# EAGLE board v001 - all (EAGLE 6.4), part 1 of 2
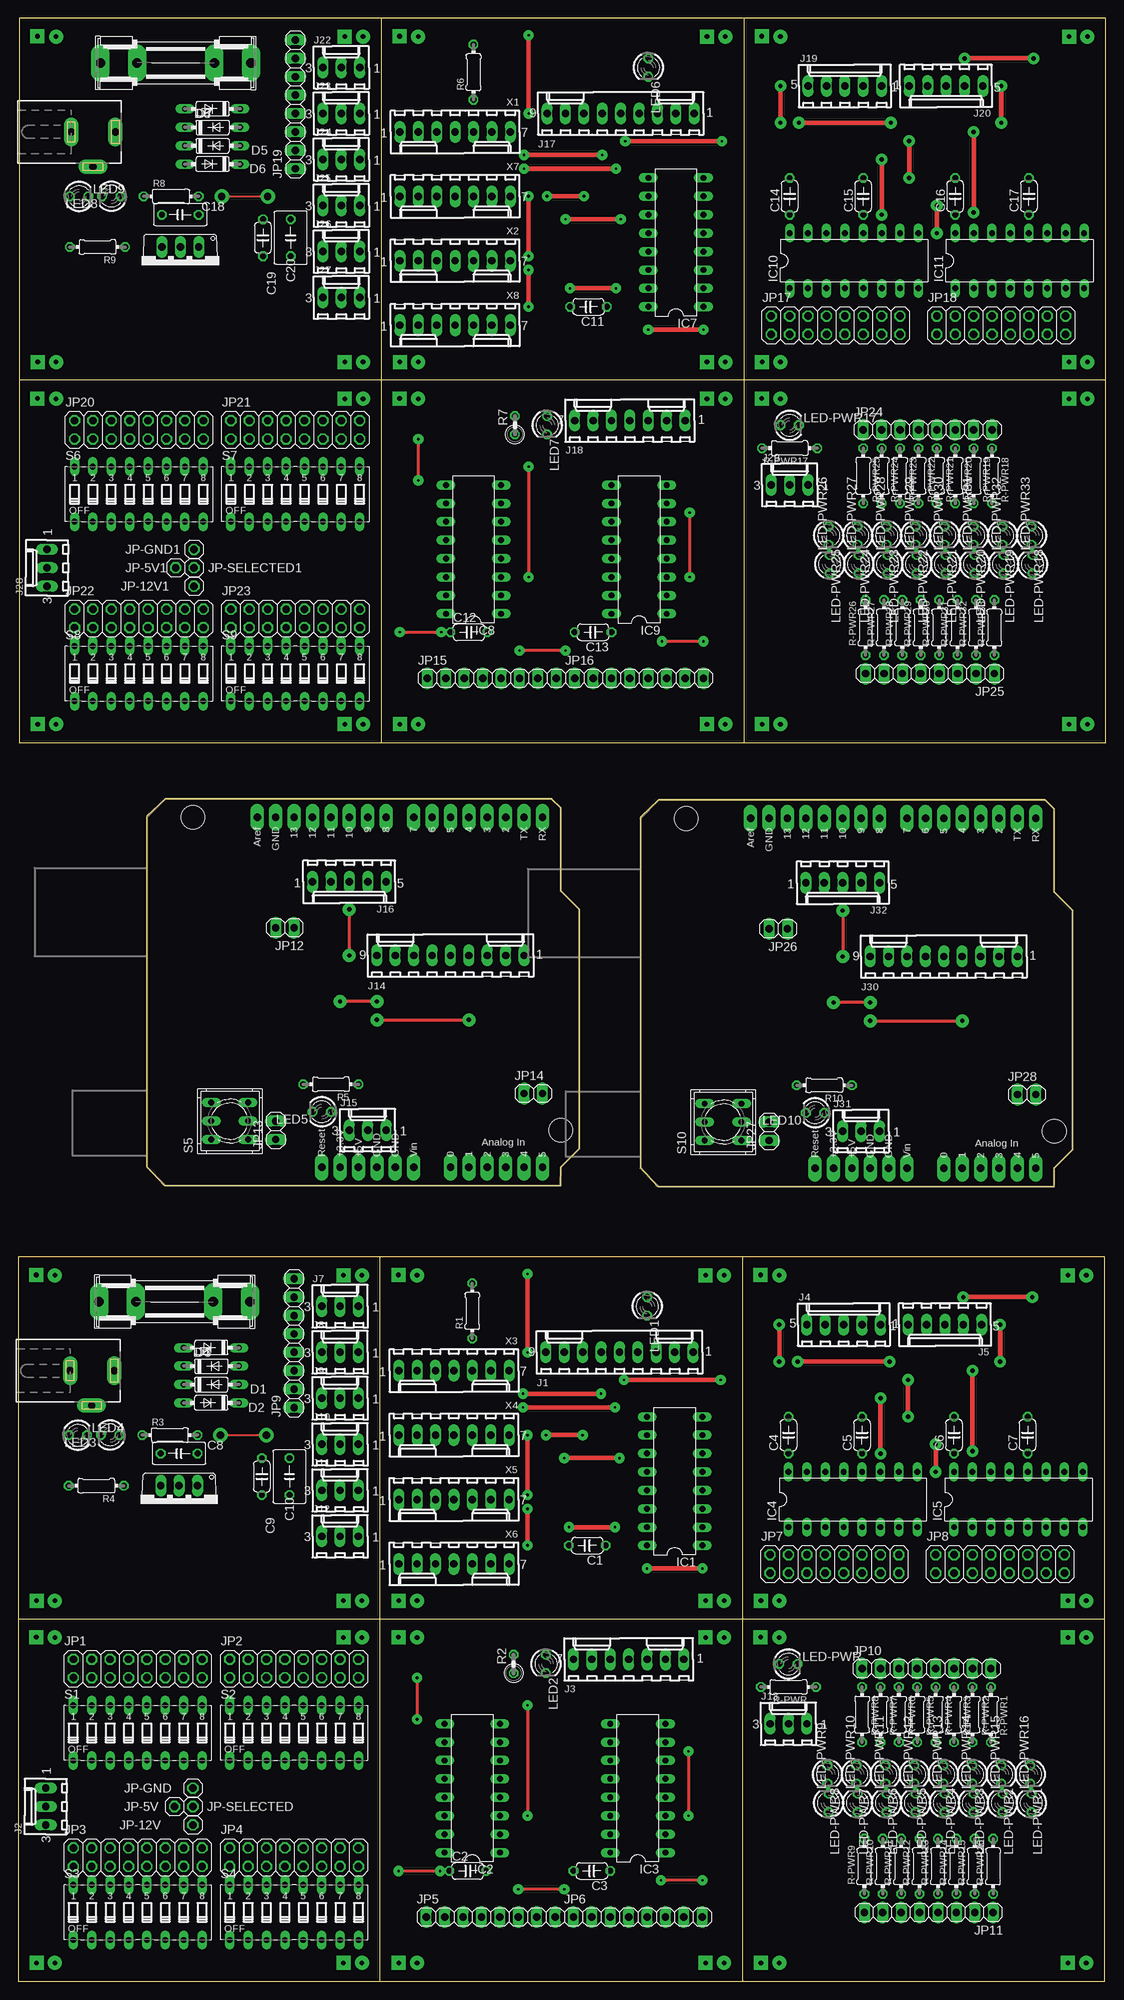
[diagram p0: board, top side]
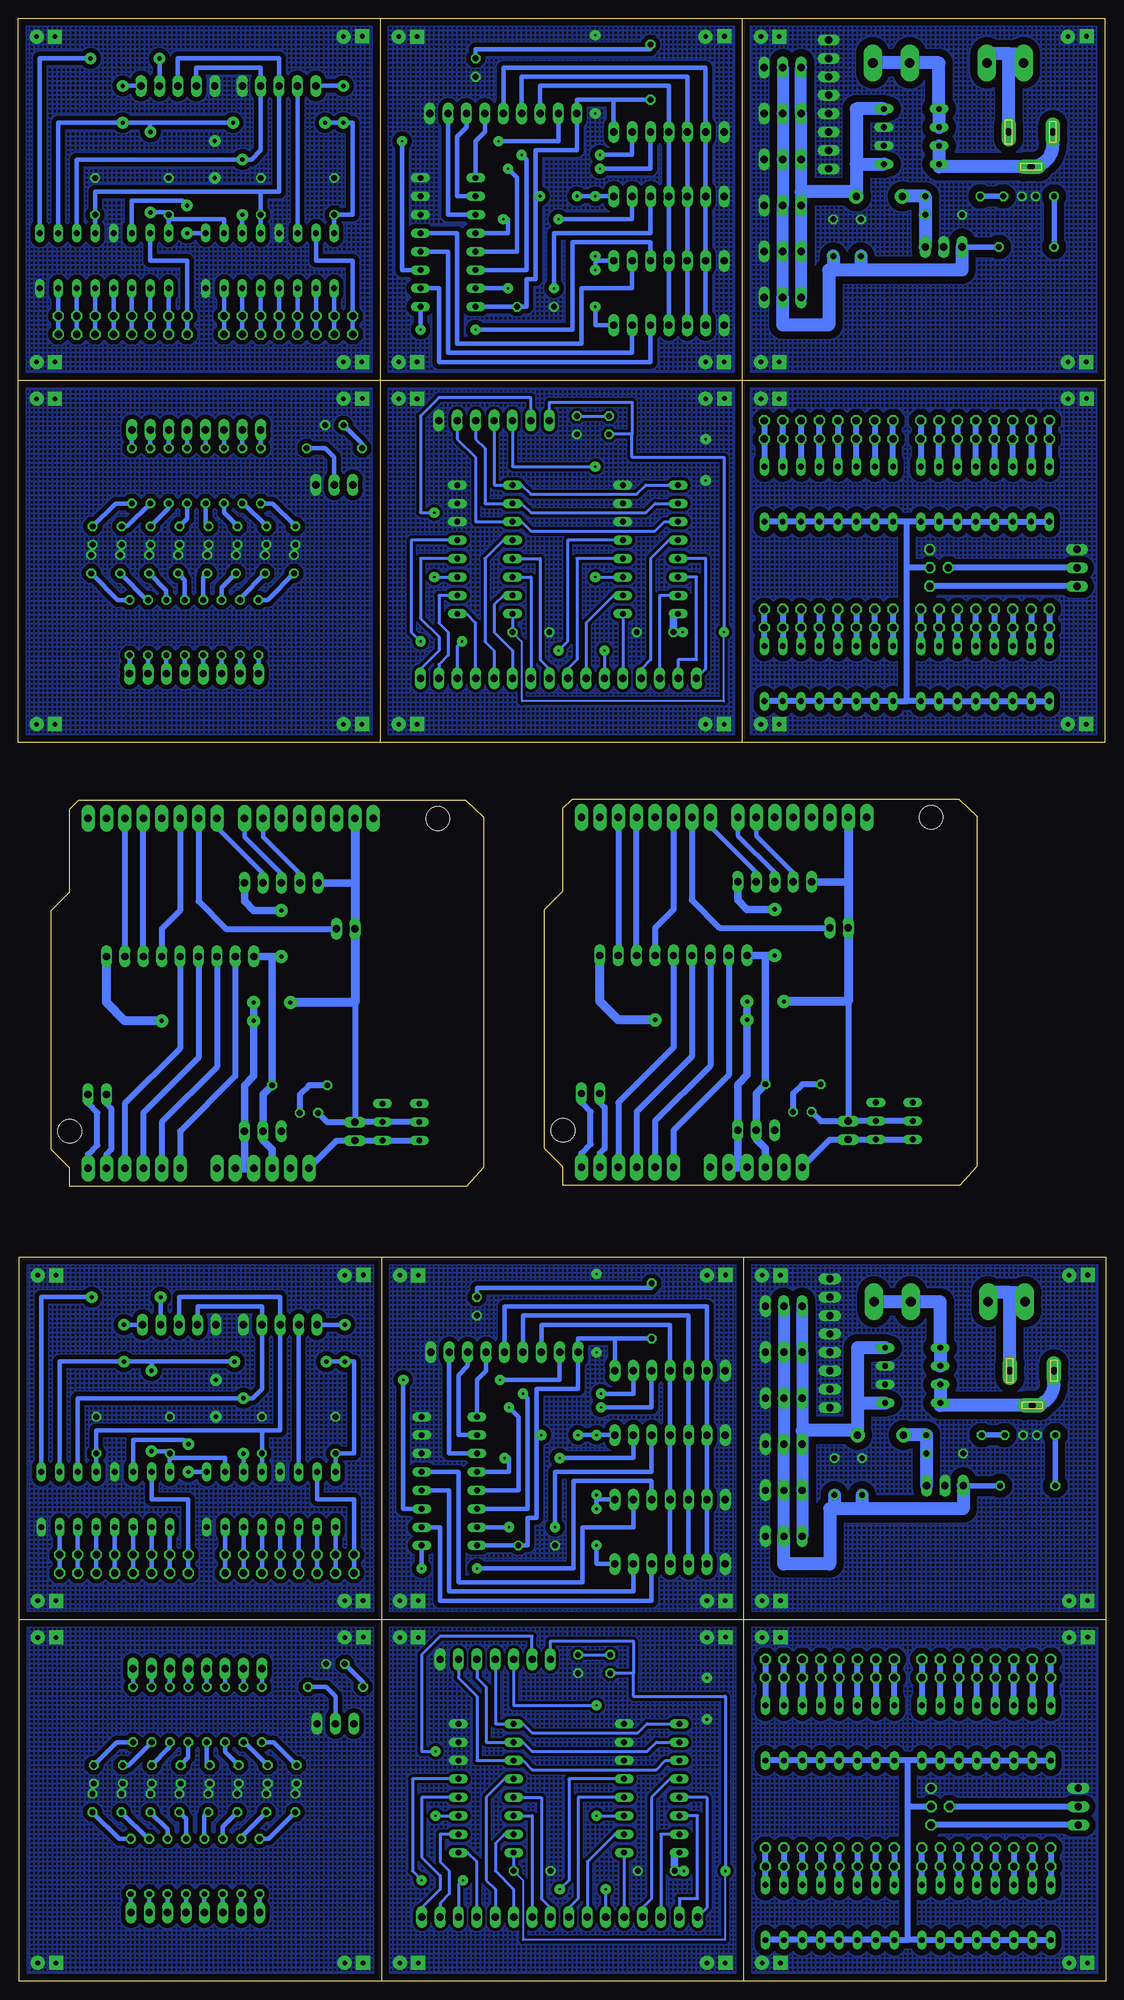
[diagram p1: board, bottom side, seen from below]

Size 150.16 x 270.98 mm. Coordinates in mm from the lower left corner, seen from the top.
Outline: 100,100 50,100
Outline: 50,0 100,0
Outline: 100,50 50,50
Outline: 150,50 150,100 100,100
Outline: 100,100 100,50
Outline: 50,50 50,100
Outline: 50,100 0,100 0,50
Outline: 50,0 0,0 0,50
Outline: 50,0 50,50
Outline: 50,50 0,50
Outline: 100,0 150,0 150,50
Outline: 150,50 100,50
Outline: 100,50 100,0
Outline: 100.17,270.98 50.16,270.98
Outline: 50.16,170.98 100.17,170.98
Outline: 100.17,220.98 50.16,220.98
Outline: 150.16,220.98 150.16,270.98 100.17,270.98
Outline: 100.17,270.98 100.17,220.98
Outline: 50.16,220.98 50.16,270.98
Outline: 50.16,270.98 0.17,270.98 0.17,220.98
Outline: 50.16,170.98 0.17,170.98 0.17,220.98
Outline: 50.16,170.98 50.16,220.98
Outline: 50.16,220.98 0.17,220.98
Outline: 100.17,170.98 150.16,170.98 150.16,220.98
Outline: 150.16,220.98 100.17,220.98
Outline: 100.17,220.98 100.17,170.98
Outline: 20.14,109.86 74.91,109.86 74.93,112.39 77.47,114.94 77.47,147.96 74.93,150.5 74.93,161.93 73.66,163.19 20.32,163.19 17.78,160.85 17.78,112.49 20.14,109.86
Outline: 88.25,109.72 143.02,109.72 143.04,112.25 145.58,114.8 145.58,147.81 143.04,150.35 143.04,161.78 141.77,163.06 88.43,163.06 85.89,160.72 85.89,112.35 88.25,109.72
Copper layers (1*16): Top 0.035mm / dielectric 1.5mm / Bottom 0.035mm
Design rules "default": minimum track width 10mil, minimum drill 24mil, track to track 8mil, track to pad 8mil, pad to pad 8mil, via to via 8mil, smd to smd 8mil, copper to edge 40mil, drill to drill 8mil, minimum pad ring 10mil, minimum via ring 8mil, stop-mask expansion 4mil, vias tented up to drill 0mil, thermal gap 10mil

## Footprints (pad centres in the part's own frame; a part is rotated, then mirrored left to right if it is on the bottom)
C050-024X044 = drill 0.813 octagon: 1 -2.54,0; 2 2.54,0
C050-030X075 = drill 0.813 octagon: 1 -2.54,0; 2 2.54,0
C050-045X075 = drill 0.813 octagon: 1 -2.54,0; 2 2.54,0
DO35-7 = drill 0.813 long: A 3.81,0; C -3.81,0
SHK20L = drill 1.321 pad 2.54 long: 1A -10.414,0; 1B -5.334,0; 2A 10.414,0; 2B 5.334,0
DIL16 = drill 0.813 long: 1 -8.89,-3.81; 2 -6.35,-3.81; 3 -3.81,-3.81; 4 -1.27,-3.81; 5 1.27,-3.81; 6 3.81,-3.81; 7 6.35,-3.81; 8 8.89,-3.81; 9 8.89,3.81; 10 6.35,3.81; 11 3.81,3.81; 12 1.27,3.81; 13 -1.27,3.81; 14 -3.81,3.81; 15 -6.35,3.81; 16 -8.89,3.81
TO220V = drill 1.016 long: 1 -2.54,-2.54; 2 0,-2.54; 3 2.54,-2.54
6410-09 = drill 1.016 long: 1 10.16,0; 2 7.62,0; 3 5.08,0; 4 2.54,0; 5 0,0; 6 -2.54,0; 7 -5.08,0; 8 -7.62,0; 9 -10.16,0
6410-03 = drill 1.016 long: 1 2.54,0; 2 0,0; 3 -2.54,0
6410-07 = drill 1.016 long: 1 7.62,0; 2 5.08,0; 3 2.54,0; 4 0,0; 5 -2.54,0; 6 -5.08,0; 7 -7.62,0
6410-05 = drill 1.016 long: 1 5.08,0; 2 2.54,0; 3 0,0; 4 -2.54,0; 5 -5.08,0
DCJ0202 = drill 1 pad 2 long: 1 0,3.1; 2 4.8,0; 3 0,-3
2X08 = drill 1.016 octagon: 1 -8.89,-1.27; 2 -8.89,1.27; 3 -6.35,-1.27; 4 -6.35,1.27; 5 -3.81,-1.27; 6 -3.81,1.27; 7 -1.27,-1.27; 8 -1.27,1.27; 9 1.27,-1.27; 10 1.27,1.27; 11 3.81,-1.27; 12 3.81,1.27; 13 6.35,-1.27; 14 6.35,1.27; 15 8.89,-1.27; 16 8.89,1.27
1X08 = drill 1.016 long: 1 -8.89,0; 2 -6.35,0; 3 -3.81,0; 4 -1.27,0; 5 1.27,0; 6 3.81,0; 7 6.35,0; 8 8.89,0
1X02 = drill 1.016 long: 1 -1.27,0; 2 1.27,0
1X01 = drill 1.016 octagon: 1 0,0
LED3MM = drill 0.813 octagon: A -1.27,0; K 1.27,0
ZZZ_MODULE_05X05 = drill 0.64 pad 1.93 square: GND@1 2.5,47.5; GND@2 44.92,47.46; GND@7 2.54,2.54; GND@8 44.92,2.54 | drill 0.64 pad 1.93: GND@3 47.46,47.46; GND@4 5.08,47.46; GND@5 47.46,2.54; GND@6 5.08,2.54
0204/7 = drill 0.813 octagon: 1 -3.81,0; 2 3.81,0
0207/2V = drill 0.813 octagon: 1 -1.27,0; 2 1.27,0
DIP08S = drill 0.813 long: 1 -8.89,-3.81; 2 -6.35,-3.81; 3 -3.81,-3.81; 4 -1.27,-3.81; 5 1.27,-3.81; 6 3.81,-3.81; 7 6.35,-3.81; 8 8.89,-3.81; 9 8.89,3.81; 10 6.35,3.81; 11 3.81,3.81; 12 1.27,3.81; 13 -1.27,3.81; 14 -3.81,3.81; 15 -6.35,3.81; 16 -8.89,3.81
9077-2 = drill 0.813 long: 1 -2.54,2.54; 2 0,2.54; 3 2.54,2.54; 4 -2.54,-2.54; 5 0,-2.54; 6 2.54,-2.54
DUEMILANOVE_SHIELD_LONGPADS = drill 1.016 pad 1.88 long: 3.3V 50.8,26.67; 5V 50.8,29.21; A0 50.8,41.91; A1 50.8,44.45; A2 50.8,46.99; A3 50.8,49.53; A4 50.8,52.07; A5 50.8,54.61; AREF 2.54,15.24; D2 2.54,49.53; D3 2.54,46.99; D4 2.54,44.45; D5 2.54,41.91; D6 2.54,39.37; D7 2.54,36.83; D8 2.54,33.02; D9 2.54,30.48; D10 2.54,27.94; D11 2.54,25.4; D12 2.54,22.86; D13 2.54,20.32; GND@0 50.8,31.75; GND@1 50.8,34.29; GND@2 2.54,17.78; RES 50.8,24.13; RX 2.54,54.61; TX 2.54,52.07; VIN 50.8,36.83 | hole 3.302: 45.72,57.15; 2.54,6.35

## Placement (x,y rotation side)
C1  0.1uF  [C050-024X044]  78.58,60.16 180 top
C2  0.1uF  [C050-024X044]  62.06,15.24 0 top
C3  0.1uF  [C050-024X044]  79.21,15.24 180 top
C4  0.1uF  [C050-024X044]  106.35,75.4 90 top
C5  0.1uF  [C050-024X044]  116.51,75.4 90 top
C6  0.1uF  [C050-024X044]  129.21,75.4 90 top
C7  0.1uF  [C050-024X044]  139.37,75.4 90 top
C8  0.33uF  [C050-030X075]  22.23,72.86 180 top
C9  0.1uF  [C050-024X044]  33.66,69.69 90 top
C10  1uF  [C050-045X075]  37.47,69.69 90 top
C11  0.1uF  [C050-024X044]  78.74,231.14 180 top
C12  0.1uF  [C050-024X044]  62.23,186.22 0 top
C13  0.1uF  [C050-024X044]  79.38,186.22 180 top
C14  0.1uF  [C050-024X044]  106.52,246.38 90 top
C15  0.1uF  [C050-024X044]  116.67,246.38 90 top
C16  0.1uF  [C050-024X044]  129.38,246.38 90 top
C17  0.1uF  [C050-024X044]  139.53,246.38 90 top
C18  0.33uF  [C050-030X075]  22.39,243.84 180 top
C19  0.1uF  [C050-024X044]  33.82,240.66 90 top
C20  1uF  [C050-045X075]  37.63,240.66 90 top
D1  1N4004  [DO35-7]  26.67,82.39 0 top
D2  1N4004  [DO35-7]  26.67,79.84 180 top
D3  1N4004  [DO35-7]  26.67,84.92 0 top
D4  1N4004  [DO35-7]  26.67,87.47 180 top
D5  1N4004  [DO35-7]  26.84,253.37 0 top
D6  1N4004  [DO35-7]  26.84,250.82 180 top
D7  1N4004  [DO35-7]  26.84,255.91 0 top
D8  1N4004  [DO35-7]  26.84,258.44 180 top
F1  3A  [SHK20L]  21.59,93.81 0 top
F2  3A  [SHK20L]  21.75,264.8 0 top
IC1  4051N  [DIL16]  90.64,69.05 90 top
IC2  4051N  [DIL16]  62.7,26.67 90 top
IC3  4051N  [DIL16]  85.56,26.67 90 top
IC4  74HC595N  [DIL16]  115.24,66.51 0 top
IC5  74HC595N  [DIL16]  138.1,66.51 0 top
IC6  7805TV  [TO220V]  22.23,65.88 180 top
IC7  4051N  [DIL16]  90.81,240.03 90 top
IC8  4051N  [DIL16]  62.87,197.65 90 top
IC9  4051N  [DIL16]  85.72,197.65 90 top
IC10  74HC595N  [DIL16]  115.41,237.49 0 top
IC11  74HC595N  [DIL16]  138.26,237.49 0 top
IC12  7805TV  [TO220V]  22.39,236.85 180 top
J1  To Arduino Shield  [6410-09]  83.02,86.83 0 top
J2  Power  [6410-03]  3.81,24.13 90 top
J3  Input  [6410-07]  84.29,44.45 0 top
J4  Input  [6410-05]  113.97,90.64 0 top
J5  Next Demux  [6410-05]  127.94,90.64 180 top
J6  12VDC  [DCJ0202]  10.16,84.29 270 top
J7  Out-1  [6410-03]  44.45,93.18 0 top
J8  Out-2  [6410-03]  44.45,86.83 0 top
J9  Out-3  [6410-03]  44.45,80.48 0 top
J10  Out-4  [6410-03]  44.45,74.13 0 top
J11  Out-5  [6410-03]  44.45,67.78 0 top
J12  Out-6  [6410-03]  44.45,61.43 0 top
J13  Power  [6410-03]  106.35,35.56 0 top
J14  Primary Input Mux  [6410-09]  59.69,141.6 0 top
J15  Power  [6410-03]  48.26,117.47 0 top
J16  Output Demux  [6410-05]  45.72,151.76 180 top
J17  To Arduino Shield  [6410-09]  83.19,257.81 0 top
J18  Input  [6410-07]  84.45,215.43 0 top
J19  Input  [6410-05]  114.14,261.62 0 top
J20  Next Demux  [6410-05]  128.1,261.62 180 top
J21  12VDC  [DCJ0202]  10.32,255.27 270 top
J22  Out-1  [6410-03]  44.62,264.16 0 top
J23  Out-2  [6410-03]  44.62,257.81 0 top
J24  Out-3  [6410-03]  44.62,251.46 0 top
J25  Out-4  [6410-03]  44.62,245.11 0 top
J26  Out-5  [6410-03]  44.62,238.76 0 top
J27  Out-6  [6410-03]  44.62,232.41 0 top
J28  Power  [6410-03]  3.98,195.11 90 top
J29  Power  [6410-03]  106.52,206.54 0 top
J30  Primary Input Mux  [6410-09]  127.8,141.47 0 top
J31  Power  [6410-03]  116.37,117.33 0 top
J32  Output Demux  [6410-05]  113.83,151.62 180 top
JP1  [2X08]  16.51,43.18 0 top
JP2  [2X08]  38.1,43.18 0 top
JP3  [2X08]  16.51,17.14 0 top
JP4  [2X08]  38.1,17.14 0 top
JP5  Input 1  [1X08]  65.24,8.89 0 top
JP6  Input 2  [1X08]  85.56,8.89 0 top
JP7  Output A  [2X08]  112.7,57.62 0 top
JP8  Output B  [2X08]  135.56,57.62 0 top
JP9  GND  [1X08]  38.1,88.1 90 top
JP10  [1X08]  125.4,43.18 0 top
JP11  [1X08]  125.72,9.53 180 top
JP12  Config  [1X02]  36.83,145.41 180 top
JP13  Reset  [1X02]  35.56,117.47 90 top
JP14  Config  [1X02]  71.12,122.56 0 top
JP15  Input 1  [1X08]  65.41,179.87 0 top
JP16  Input 2  [1X08]  85.72,179.87 0 top
JP17  Output A  [2X08]  112.86,228.6 0 top
JP18  Output B  [2X08]  135.72,228.6 0 top
JP19  GND  [1X08]  38.27,259.08 90 top
JP20  [2X08]  16.68,214.16 0 top
JP21  [2X08]  38.27,214.16 0 top
JP22  [2X08]  16.68,188.12 0 top
JP23  [2X08]  38.27,188.12 0 top
JP24  [1X08]  125.56,214.16 0 top
JP25  [1X08]  125.88,180.5 180 top
JP26  Config  [1X02]  104.94,145.28 180 top
JP27  Reset  [1X02]  103.67,117.33 90 top
JP28  Config  [1X02]  139.23,122.42 0 top
JP-5V  [1X01]  21.59,24.13 0 top
JP-5V1  [1X01]  21.75,195.11 0 top
JP-12V  [1X01]  24.13,21.59 0 top
JP-12V1  [1X01]  24.3,192.57 0 top
JP-GND  [1X01]  24.13,26.67 0 top
JP-GND1  [1X01]  24.3,197.65 0 top
JP-SELECTED  [1X01]  24.13,24.13 0 top
JP-SELECTED1  [1X01]  24.3,195.11 0 top
LED1  Green  [LED3MM]  86.83,93.18 270 top
LED2  Green  [LED3MM]  72.86,43.81 270 top
LED3  GREEN  [LED3MM]  12.7,75.4 180 top
LED4  GREEN  [LED3MM]  8.26,75.4 0 top
LED5  Green  [LED3MM]  41.91,120.02 180 top
LED6  Green  [LED3MM]  87,264.16 270 top
LED7  Green  [LED3MM]  73.03,214.79 270 top
LED8  GREEN  [LED3MM]  12.87,246.38 180 top
LED9  GREEN  [LED3MM]  8.42,246.38 0 top
LED10  Green  [LED3MM]  110.02,119.88 180 top
LED-PWR  Green  [LED3MM]  106.35,43.81 0 top
LED-PWR1  Yellow  [LED3MM]  139.72,28.58 270 top
LED-PWR2  Yellow  [LED3MM]  135.72,28.58 270 top
LED-PWR3  Yellow  [LED3MM]  131.72,28.58 270 top
LED-PWR4  Yellow  [LED3MM]  127.72,28.58 270 top
LED-PWR5  Yellow  [LED3MM]  123.72,28.58 270 top
LED-PWR6  Yellow  [LED3MM]  119.72,28.58 270 top
LED-PWR7  Yellow  [LED3MM]  115.72,28.58 270 top
LED-PWR8  Yellow  [LED3MM]  111.72,28.58 270 top
LED-PWR9  Yellow  [LED3MM]  111.91,24.64 90 top
LED-PWR10  Yellow  [LED3MM]  115.91,24.64 90 top
LED-PWR11  Yellow  [LED3MM]  119.91,24.64 90 top
LED-PWR12  Yellow  [LED3MM]  123.91,24.64 90 top
LED-PWR13  Yellow  [LED3MM]  127.91,24.64 90 top
LED-PWR14  Yellow  [LED3MM]  131.91,24.64 90 top
LED-PWR15  Yellow  [LED3MM]  135.91,24.64 90 top
LED-PWR16  Yellow  [LED3MM]  139.91,24.64 90 top
LED-PWR17  Green  [LED3MM]  106.52,214.79 0 top
LED-PWR18  Yellow  [LED3MM]  139.88,199.56 270 top
LED-PWR19  Yellow  [LED3MM]  135.88,199.56 270 top
LED-PWR20  Yellow  [LED3MM]  131.88,199.56 270 top
LED-PWR21  Yellow  [LED3MM]  127.89,199.56 270 top
LED-PWR22  Yellow  [LED3MM]  123.89,199.56 270 top
LED-PWR23  Yellow  [LED3MM]  119.89,199.56 270 top
LED-PWR24  Yellow  [LED3MM]  115.89,199.56 270 top
LED-PWR25  Yellow  [LED3MM]  111.89,199.56 270 top
LED-PWR26  Yellow  [LED3MM]  112.07,195.62 90 top
LED-PWR27  Yellow  [LED3MM]  116.07,195.62 90 top
LED-PWR28  Yellow  [LED3MM]  120.07,195.62 90 top
LED-PWR29  Yellow  [LED3MM]  124.07,195.62 90 top
LED-PWR30  Yellow  [LED3MM]  128.07,195.62 90 top
LED-PWR31  Yellow  [LED3MM]  132.07,195.62 90 top
LED-PWR32  Yellow  [LED3MM]  136.07,195.62 90 top
LED-PWR33  Yellow  [LED3MM]  140.07,195.62 90 top
PCB1  ZZZ_MODULE05X05  [ZZZ_MODULE_05X05]  0,0 0 top
PCB2  ZZZ_MODULE05X05  [ZZZ_MODULE_05X05]  50,50 0 top
PCB3  ZZZ_MODULE05X05  [ZZZ_MODULE_05X05]  50,0 0 top
PCB4  ZZZ_MODULE05X05  [ZZZ_MODULE_05X05]  100,50 0 top
PCB5  ZZZ_MODULE05X05  [ZZZ_MODULE_05X05]  0,50 0 top
PCB6  ZZZ_MODULE05X05  [ZZZ_MODULE_05X05]  100,0 0 top
PCB7  ZZZ_MODULE05X05  [ZZZ_MODULE_05X05]  50.16,220.98 0 top
PCB8  ZZZ_MODULE05X05  [ZZZ_MODULE_05X05]  50.16,170.98 0 top
PCB9  ZZZ_MODULE05X05  [ZZZ_MODULE_05X05]  100.17,220.98 0 top
PCB10  ZZZ_MODULE05X05  [ZZZ_MODULE_05X05]  0.17,220.98 0 top
PCB11  ZZZ_MODULE05X05  [ZZZ_MODULE_05X05]  0.17,170.98 0 top
PCB12  ZZZ_MODULE05X05  [ZZZ_MODULE_05X05]  100.17,170.98 0 top
R1  470R  [0204/7]  62.7,92.55 90 top
R2  470R  [0207/2V]  68.42,43.81 90 top
R3  470R  [0204/7]  20.95,75.4 0 top
R4  470R  [0204/7]  10.79,68.42 180 top
R5  470R  [0204/7]  43.18,123.83 180 top
R6  470R  [0204/7]  62.87,263.52 90 top
R7  470R  [0207/2V]  68.58,214.79 90 top
R8  470R  [0204/7]  21.12,246.38 0 top
R9  470R  [0204/7]  10.96,239.4 180 top
R10  470R  [0204/7]  111.29,123.69 180 top
R-PWR  470R  [0204/7]  106.35,40.64 180 top
R-PWR1  470R  [0204/7]  134.29,36.83 270 top
R-PWR2  470R  [0204/7]  131.75,36.83 270 top
R-PWR3  470R  [0204/7]  129.21,36.83 270 top
R-PWR4  470R  [0204/7]  126.67,36.83 270 top
R-PWR5  470R  [0204/7]  124.13,36.83 270 top
R-PWR6  470R  [0204/7]  121.59,36.83 270 top
R-PWR7  470R  [0204/7]  119.05,36.83 270 top
R-PWR8  470R  [0204/7]  116.51,36.83 270 top
R-PWR9  470R  [0204/7]  116.83,15.88 90 top
R-PWR10  470R  [0204/7]  119.37,15.88 90 top
R-PWR11  470R  [0204/7]  121.91,15.88 90 top
R-PWR12  470R  [0204/7]  124.45,15.88 90 top
R-PWR13  470R  [0204/7]  126.99,15.88 90 top
R-PWR14  470R  [0204/7]  129.53,15.88 90 top
R-PWR15  470R  [0204/7]  132.07,15.88 90 top
R-PWR16  470R  [0204/7]  134.61,15.88 90 top
R-PWR17  470R  [0204/7]  106.52,211.62 180 top
R-PWR18  470R  [0204/7]  134.46,207.81 270 top
R-PWR19  470R  [0204/7]  131.91,207.81 270 top
R-PWR20  470R  [0204/7]  129.38,207.81 270 top
R-PWR21  470R  [0204/7]  126.83,207.81 270 top
R-PWR22  470R  [0204/7]  124.3,207.81 270 top
R-PWR23  470R  [0204/7]  121.75,207.81 270 top
R-PWR24  470R  [0204/7]  119.22,207.81 270 top
R-PWR25  470R  [0204/7]  116.67,207.81 270 top
R-PWR26  470R  [0204/7]  116.99,186.85 90 top
R-PWR27  470R  [0204/7]  119.53,186.85 90 top
R-PWR28  470R  [0204/7]  122.07,186.85 90 top
R-PWR29  470R  [0204/7]  124.61,186.85 90 top
R-PWR30  470R  [0204/7]  127.15,186.85 90 top
R-PWR31  470R  [0204/7]  129.69,186.85 90 top
R-PWR32  470R  [0204/7]  132.23,186.85 90 top
R-PWR33  470R  [0204/7]  134.77,186.85 90 top
S1  [DIP08S]  16.51,34.29 0 top
S2  [DIP08S]  38.1,34.29 0 top
S3  [DIP08S]  16.51,9.53 0 top
S4  [DIP08S]  38.1,9.53 0 top
S5  9077-2  [9077-2]  29.21,118.75 90 top
S6  [DIP08S]  16.68,205.27 0 top
S7  [DIP08S]  38.27,205.27 0 top
S8  [DIP08S]  16.68,180.5 0 top
S9  [DIP08S]  38.27,180.5 0 top
S10  9077-2  [9077-2]  97.32,118.61 90 top
U1  ARDUINO_SHIELDLONGPADS  [DUEMILANOVE_SHIELD_LONGPADS]  17.78,163.19 270 top
U2  ARDUINO_SHIELDLONGPADS  [DUEMILANOVE_SHIELD_LONGPADS]  85.89,163.06 270 top
X1  Sec 12  [6410-07]  60.33,255.27 180 top
X2  Sec 56  [6410-07]  60.33,237.49 180 top
X3  Sec 12  [6410-07]  60.16,84.29 180 top
X4  Sec 34  [6410-07]  60.16,75.4 180 top
X5  Sec 56  [6410-07]  60.16,66.51 180 top
X6  Sec 78  [6410-07]  60.16,57.62 180 top
X7  Sec 34  [6410-07]  60.33,246.38 180 top
X8  Sec 78  [6410-07]  60.33,228.6 180 top

## Library data of the parts
C1-C20 R1-R10 R-PWR R-PWR1-R-PWR33 = rcl
D1-D8 = diode
F1 F2 = fuse; OC_FARNELL: unknown; OC_NEWARK: unknown
IC1-IC3 IC7-IC9 = 40xx
IC4 IC5 IC10 IC11 = 74xx-eu
IC6 IC12 = linear
J1-J5 J7-J20 J22-J32 X1-X8 = con-molex; OC_FARNELL: unknown; OC_NEWARK: unknown
J6 J21 = con-jack; OC_FARNELL: unknown; OC_NEWARK: unknown
JP1-JP28 JP-5V JP-5V1 JP-12V JP-12V1 JP-GND JP-GND1 JP-SELECTED JP-SELECTED1 = pinhead
LED1-LED10 LED-PWR LED-PWR1-LED-PWR33 = led
PCB1-PCB12 = GNLib
S1-S4 S6-S9 = switch-dil; OC_FARNELL: unknown; OC_NEWARK: unknown
S5 S10 = switch-misc
U1 U2 = SparkFun-Boards

## Nets
!CONFIGURATION: JP12.1 U1.D6
!CONFIGURATION1: JP26.1 U2.D6
!RESET: JP13.1 S5.1 S5.4 U1.RES
!RESET1: JP27.1 S10.1 S10.4 U2.RES
+5V: J2.2 JP-5V.1
+5V1: C1.1 IC1.16 J1.9 R1.1 X3.7 X4.7 X5.7 X6.7
+5V2: C2.1 C3.1 IC2.16 IC3.16 J3.7 R2.1
+5V3: C4.1 C6.1 IC4.10 IC4.16 IC5.10 IC5.16 J4.5 J5.5
+5V4: C9.1 C10.1 IC6.3 J7.2 J8.2 J9.2 J10.2 J11.2 J12.2 R4.1
+5V5: J13.2 R-PWR.1
+5V6: J14.9 J15.2 J16.5 R5.1 U1.5V
+5V7: C11.1 IC7.16 J17.9 R6.1 X1.7 X2.7 X7.7 X8.7
+5V8: C12.1 C13.1 IC8.16 IC9.16 J18.7 R7.1
+5V9: C14.1 C16.1 IC10.10 IC10.16 IC11.10 IC11.16 J19.5 J20.5
+5V10: C19.1 C20.1 IC12.3 J22.2 J23.2 J24.2 J25.2 J26.2 J27.2 R9.1
+5V11: J28.2 JP-5V1.1
+5V12: J29.2 R-PWR17.1
+5V13: J30.9 J31.2 J32.5 R10.1 U2.5V
+12V: J2.3 JP-12V.1
+12V1: C8.1 D2.C D4.C IC6.1 J7.3 J8.3 J9.3 J10.3 J11.3 J12.3 R3.2
+12V2: J13.3
+12V3: C18.1 D6.C D8.C IC12.1 J22.3 J23.3 J24.3 J25.3 J26.3 J27.3 R8.2
+12V4: J28.3 JP-12V1.1
+12V5: J29.3
GND: J2.1 JP-GND.1 PCB1.GND@1 PCB1.GND@2 PCB1.GND@3 PCB1.GND@4 PCB1.GND@5 PCB1.GND@6 PCB1.GND@7 PCB1.GND@8
GND1: C1.2 IC1.6 IC1.7 IC1.8 J1.1 LED1.K PCB2.GND@1 PCB2.GND@2 PCB2.GND@3 PCB2.GND@4 PCB2.GND@5 PCB2.GND@6 PCB2.GND@7 PCB2.GND@8 X3.1 X4.1 X5.1 X6.1
GND2: C2.2 C3.2 IC2.6 IC2.7 IC2.8 IC3.6 IC3.7 IC3.8 J3.1 LED2.K PCB3.GND@1 PCB3.GND@2 PCB3.GND@3 PCB3.GND@4 PCB3.GND@5 PCB3.GND@6 PCB3.GND@7 PCB3.GND@8
GND3: C4.2 C5.2 C6.2 C7.2 IC4.8 IC4.13 IC5.8 IC5.13 J4.1 J5.1 PCB4.GND@1 PCB4.GND@2 PCB4.GND@3 PCB4.GND@4 PCB4.GND@5 PCB4.GND@6 PCB4.GND@7 PCB4.GND@8
GND4: C8.2 C9.2 C10.2 D1.A D3.A IC6.2 J7.1 J8.1 J9.1 J10.1 J11.1 J12.1 JP9.1 JP9.2 JP9.3 JP9.4 JP9.5 JP9.6 JP9.7 JP9.8 LED3.K LED4.K PCB5.GND@1 PCB5.GND@2 PCB5.GND@3 PCB5.GND@4 PCB5.GND@5 PCB5.GND@6 PCB5.GND@7 PCB5.GND@8
GND5: J13.1 LED-PWR1.K LED-PWR2.K LED-PWR3.K LED-PWR4.K LED-PWR5.K LED-PWR6.K LED-PWR7.K LED-PWR8.K LED-PWR9.K LED-PWR10.K LED-PWR11.K LED-PWR12.K LED-PWR13.K LED-PWR14.K LED-PWR15.K LED-PWR16.K LED-PWR.K PCB6.GND@1 PCB6.GND@2 PCB6.GND@3 PCB6.GND@4 PCB6.GND@5 PCB6.GND@6 PCB6.GND@7 PCB6.GND@8
GND6: J14.1 J15.1 J16.1 JP12.2 JP13.2 LED5.K S5.2 S5.5 U1.GND@0 U1.GND@1 U1.GND@2
GND7: C11.2 IC7.6 IC7.7 IC7.8 J17.1 LED6.K PCB7.GND@1 PCB7.GND@2 PCB7.GND@3 PCB7.GND@4 PCB7.GND@5 PCB7.GND@6 PCB7.GND@7 PCB7.GND@8 X1.1 X2.1 X7.1 X8.1
GND8: C12.2 C13.2 IC8.6 IC8.7 IC8.8 IC9.6 IC9.7 IC9.8 J18.1 LED7.K PCB8.GND@1 PCB8.GND@2 PCB8.GND@3 PCB8.GND@4 PCB8.GND@5 PCB8.GND@6 PCB8.GND@7 PCB8.GND@8
GND9: C14.2 C15.2 C16.2 C17.2 IC10.8 IC10.13 IC11.8 IC11.13 J19.1 J20.1 PCB9.GND@1 PCB9.GND@2 PCB9.GND@3 PCB9.GND@4 PCB9.GND@5 PCB9.GND@6 PCB9.GND@7 PCB9.GND@8
GND10: C18.2 C19.2 C20.2 D5.A D7.A IC12.2 J22.1 J23.1 J24.1 J25.1 J26.1 J27.1 JP19.1 JP19.2 JP19.3 JP19.4 JP19.5 JP19.6 JP19.7 JP19.8 LED8.K LED9.K PCB10.GND@1 PCB10.GND@2 PCB10.GND@3 PCB10.GND@4 PCB10.GND@5 PCB10.GND@6 PCB10.GND@7 PCB10.GND@8
GND11: J28.1 JP-GND1.1 PCB11.GND@1 PCB11.GND@2 PCB11.GND@3 PCB11.GND@4 PCB11.GND@5 PCB11.GND@6 PCB11.GND@7 PCB11.GND@8
GND12: J29.1 LED-PWR17.K LED-PWR18.K LED-PWR19.K LED-PWR20.K LED-PWR21.K LED-PWR22.K LED-PWR23.K LED-PWR24.K LED-PWR25.K LED-PWR26.K LED-PWR27.K LED-PWR28.K LED-PWR29.K LED-PWR30.K LED-PWR31.K LED-PWR32.K LED-PWR33.K PCB12.GND@1 PCB12.GND@2 PCB12.GND@3 PCB12.GND@4 PCB12.GND@5 PCB12.GND@6 PCB12.GND@7 PCB12.GND@8
GND13: J30.1 J31.1 J32.1 JP26.2 JP27.2 LED10.K S10.2 S10.5 U2.GND@0 U2.GND@1 U2.GND@2
IN_CLOCK: IC4.11 IC5.11 J4.2 J5.2
IN_CLOCK1: IC10.11 IC11.11 J19.2 J20.2
IN_DATA: IC4.14 J4.4
IN_DATA1: IC10.14 J19.4
IN_LATCH: C5.1 C7.1 IC4.12 IC5.12 J4.3 J5.3
IN_LATCH1: C15.1 C17.1 IC10.12 IC11.12 J19.3 J20.3
IN_SELECT_A: J14.2 U1.D2
IN_SELECT_A1: J30.2 U2.D2
IN_SELECT_B: J14.3 U1.D3
IN_SELECT_B1: J30.3 U2.D3
IN_SELECT_C: J14.4 U1.D5
IN_SELECT_C1: J30.4 U2.D5
IN_SELECT_D: J14.5 U1.A3
IN_SELECT_D1: J30.5 U2.A3
IN_SELECT_E: J14.6 U1.A2
IN_SELECT_E1: J30.6 U2.A2
IN_SELECT_F: J14.7 U1.A1
IN_SELECT_F1: J30.7 U2.A1
INPUT_1: IC2.13 JP5.1
INPUT_2: IC2.14 JP5.2
INPUT_3: IC2.15 JP5.3
INPUT_4: IC2.12 JP5.4
INPUT_5: IC2.1 JP5.5
INPUT_6: IC2.5 JP5.6
INPUT_7: IC2.2 JP5.7
INPUT_8: IC2.4 JP5.8
INPUT_9: IC3.13 JP6.1
INPUT_10: IC3.14 JP6.2
INPUT_11: IC3.15 JP6.3
INPUT_12: IC3.12 JP6.4
INPUT_13: IC3.1 JP6.5
INPUT_14: IC3.5 JP6.6
INPUT_15: IC3.2 JP6.7
INPUT_16: IC8.13 JP15.1
INPUT_17: IC8.14 JP15.2
INPUT_18: IC8.15 JP15.3
INPUT_19: IC8.12 JP15.4
INPUT_20: IC8.1 JP15.5
INPUT_21: IC8.5 JP15.6
INPUT_22: IC8.2 JP15.7
INPUT_23: IC8.4 JP15.8
INPUT_24: IC9.13 JP16.1
INPUT_25: IC9.14 JP16.2
INPUT_26: IC9.15 JP16.3
INPUT_27: IC9.12 JP16.4
INPUT_28: IC9.1 JP16.5
INPUT_29: IC9.5 JP16.6
INPUT_30: IC9.2 JP16.7
INPUT_READ: IC1.3 J1.8
INPUT_READ1: J14.8 U1.A0
INPUT_READ2: IC7.3 J17.8
INPUT_READ3: J30.8 U2.A0
N$1: JP3.1 JP3.2 S3.16
N$2: JP3.3 JP3.4 S3.15
N$3: LED1.A R1.2
N$4: JP1.1 JP1.2 S1.16
N$5: JP1.3 JP1.4 S1.15
N$6: JP1.5 JP1.6 S1.14
N$7: JP1.7 JP1.8 S1.13
N$8: JP1.9 JP1.10 S1.12
N$9: JP1.11 JP1.12 S1.11
N$10: JP1.13 JP1.14 S1.10
N$11: JP1.15 JP1.16 S1.9
N$12: JP2.1 JP2.2 S2.16
N$13: JP2.3 JP2.4 S2.15
N$14: JP2.5 JP2.6 S2.14
N$15: JP2.7 JP2.8 S2.13
N$16: JP2.9 JP2.10 S2.12
N$17: JP2.11 JP2.12 S2.11
N$18: JP2.13 JP2.14 S2.10
N$19: JP2.15 JP2.16 S2.9
N$20: JP3.5 JP3.6 S3.14
N$21: JP3.7 JP3.8 S3.13
N$22: JP3.9 JP3.10 S3.12
N$23: JP3.11 JP3.12 S3.11
N$24: JP3.13 JP3.14 S3.10
N$25: JP3.15 JP3.16 S3.9
N$26: JP4.1 JP4.2 S4.16
N$27: JP4.3 JP4.4 S4.15
N$28: JP4.5 JP4.6 S4.14
N$29: JP4.7 JP4.8 S4.13
N$30: JP4.9 JP4.10 S4.12
N$31: JP4.11 JP4.12 S4.11
N$32: JP4.13 JP4.14 S4.10
N$33: JP4.15 JP4.16 S4.9
N$34: JP-SELECTED.1 S1.1 S1.2 S1.3 S1.4 S1.5 S1.6 S1.7 S1.8 S2.1 S2.2 S2.3 S2.4 S2.5 S2.6 S2.7 S2.8 S3.1 S3.2 S3.3 S3.4 S3.5 S3.6 S3.7 S3.8 S4.1 S4.2 S4.3 S4.4 S4.5 S4.6 S4.7 S4.8
N$35: LED2.A R2.2
N$36: IC3.4 JP6.8
N$37: IC4.15 JP7.1 JP7.2
N$38: IC4.1 JP7.3 JP7.4
N$39: IC4.2 JP7.5 JP7.6
N$40: IC4.3 JP7.7 JP7.8
N$41: IC4.4 JP7.9 JP7.10
N$42: IC4.5 JP7.11 JP7.12
N$43: IC4.6 JP7.13 JP7.14
N$44: IC4.7 JP7.15 JP7.16
N$45: IC5.15 JP8.1 JP8.2
N$46: IC5.1 JP8.3 JP8.4
N$47: IC5.2 JP8.5 JP8.6
N$48: IC5.3 JP8.7 JP8.8
N$49: IC5.4 JP8.9 JP8.10
N$50: IC5.5 JP8.11 JP8.12
N$51: IC5.6 JP8.13 JP8.14
N$52: IC5.7 JP8.15 JP8.16
N$53: IC4.9 IC5.14
N$54: D1.C D2.A J6.2 J6.3
N$55: D3.C D4.A F1.2A
N$56: LED3.A R3.1
N$57: LED4.A R4.2
N$58: F1.1A J6.1
N$59: LED-PWR.A R-PWR.2
N$60: JP10.8 R-PWR1.1
N$61: JP10.7 R-PWR2.1
N$62: JP10.6 R-PWR3.1
N$63: JP10.5 R-PWR4.1
N$64: JP10.4 R-PWR5.1
N$65: JP10.3 R-PWR6.1
N$66: JP10.2 R-PWR7.1
N$67: JP10.1 R-PWR8.1
N$68: LED-PWR1.A R-PWR1.2
N$69: LED-PWR2.A R-PWR2.2
N$70: LED-PWR3.A R-PWR3.2
N$71: LED-PWR4.A R-PWR4.2
N$72: LED-PWR5.A R-PWR5.2
N$73: LED-PWR6.A R-PWR6.2
N$74: LED-PWR7.A R-PWR7.2
N$75: LED-PWR8.A R-PWR8.2
N$76: JP11.8 R-PWR9.1
N$77: JP11.7 R-PWR10.1
N$78: JP11.6 R-PWR11.1
N$79: JP11.5 R-PWR12.1
N$80: JP11.4 R-PWR13.1
N$81: JP11.3 R-PWR14.1
N$82: JP11.2 R-PWR15.1
N$83: JP11.1 R-PWR16.1
N$84: LED-PWR9.A R-PWR9.2
N$85: LED-PWR10.A R-PWR10.2
N$86: LED-PWR11.A R-PWR11.2
N$87: LED-PWR12.A R-PWR12.2
N$88: LED-PWR13.A R-PWR13.2
N$89: LED-PWR14.A R-PWR14.2
N$90: LED-PWR15.A R-PWR15.2
N$91: LED-PWR16.A R-PWR16.2
N$92: LED5.A R5.2
N$93: LED6.A R6.2
N$94: LED7.A R7.2
N$95: IC9.4 JP16.8
N$96: IC10.15 JP17.1 JP17.2
N$97: IC10.1 JP17.3 JP17.4
N$98: IC10.2 JP17.5 JP17.6
N$99: IC10.3 JP17.7 JP17.8
N$100: IC10.4 JP17.9 JP17.10
N$101: IC10.5 JP17.11 JP17.12
N$102: IC10.6 JP17.13 JP17.14
N$103: IC10.7 JP17.15 JP17.16
N$104: IC11.15 JP18.1 JP18.2
N$105: IC11.1 JP18.3 JP18.4
N$106: IC11.2 JP18.5 JP18.6
N$107: IC11.3 JP18.7 JP18.8
N$108: IC11.4 JP18.9 JP18.10
N$109: IC11.5 JP18.11 JP18.12
N$110: IC11.6 JP18.13 JP18.14
N$111: IC11.7 JP18.15 JP18.16
N$112: IC10.9 IC11.14
N$113: D5.C D6.A J21.2 J21.3
N$114: D7.C D8.A F2.2A
N$115: LED8.A R8.1
N$116: LED9.A R9.2
N$117: F2.1A J21.1
N$118: JP20.1 JP20.2 S6.16
N$119: JP20.3 JP20.4 S6.15
N$120: JP20.5 JP20.6 S6.14
N$121: JP20.7 JP20.8 S6.13
N$122: JP20.9 JP20.10 S6.12
N$123: JP20.11 JP20.12 S6.11
N$124: JP20.13 JP20.14 S6.10
N$125: JP20.15 JP20.16 S6.9
N$126: JP21.1 JP21.2 S7.16
N$127: JP21.3 JP21.4 S7.15
N$128: JP21.5 JP21.6 S7.14
N$129: JP21.7 JP21.8 S7.13
N$130: JP21.9 JP21.10 S7.12
N$131: JP21.11 JP21.12 S7.11
N$132: JP21.13 JP21.14 S7.10
N$133: JP21.15 JP21.16 S7.9
N$134: JP22.1 JP22.2 S8.16
N$135: JP22.3 JP22.4 S8.15
N$136: JP22.5 JP22.6 S8.14
N$137: JP22.7 JP22.8 S8.13
N$138: JP22.9 JP22.10 S8.12
N$139: JP22.11 JP22.12 S8.11
N$140: JP22.13 JP22.14 S8.10
N$141: JP22.15 JP22.16 S8.9
N$142: JP23.1 JP23.2 S9.16
N$143: JP23.3 JP23.4 S9.15
N$144: JP23.5 JP23.6 S9.14
N$145: JP23.7 JP23.8 S9.13
N$146: JP23.9 JP23.10 S9.12
N$147: JP23.11 JP23.12 S9.11
N$148: JP23.13 JP23.14 S9.10
N$149: JP23.15 JP23.16 S9.9
N$150: JP-SELECTED1.1 S6.1 S6.2 S6.3 S6.4 S6.5 S6.6 S6.7 S6.8 S7.1 S7.2 S7.3 S7.4 S7.5 S7.6 S7.7 S7.8 S8.1 S8.2 S8.3 S8.4 S8.5 S8.6 S8.7 S8.8 S9.1 S9.2 S9.3 S9.4 S9.5 S9.6 S9.7 S9.8
N$151: LED-PWR17.A R-PWR17.2
N$152: JP24.8 R-PWR18.1
N$153: JP24.7 R-PWR19.1
N$154: JP24.6 R-PWR20.1
N$155: JP24.5 R-PWR21.1
N$156: JP24.4 R-PWR22.1
N$157: JP24.3 R-PWR23.1
N$158: JP24.2 R-PWR24.1
N$159: JP24.1 R-PWR25.1
N$160: LED-PWR18.A R-PWR18.2
N$161: LED-PWR19.A R-PWR19.2
N$162: LED-PWR20.A R-PWR20.2
N$163: LED-PWR21.A R-PWR21.2
N$164: LED-PWR22.A R-PWR22.2
N$165: LED-PWR23.A R-PWR23.2
N$166: LED-PWR24.A R-PWR24.2
N$167: LED-PWR25.A R-PWR25.2
N$168: JP25.8 R-PWR26.1
N$169: JP25.7 R-PWR27.1
N$170: JP25.6 R-PWR28.1
N$171: JP25.5 R-PWR29.1
N$172: JP25.4 R-PWR30.1
N$173: JP25.3 R-PWR31.1
N$174: JP25.2 R-PWR32.1
N$175: JP25.1 R-PWR33.1
N$176: LED-PWR26.A R-PWR26.2
N$177: LED-PWR27.A R-PWR27.2
N$178: LED-PWR28.A R-PWR28.2
N$179: LED-PWR29.A R-PWR29.2
N$180: LED-PWR30.A R-PWR30.2
N$181: LED-PWR31.A R-PWR31.2
N$182: LED-PWR32.A R-PWR32.2
N$183: LED-PWR33.A R-PWR33.2
N$184: LED10.A R10.2
NC_3V: U1.3.3V
NC_3V1: U2.3.3V
NC_HREF: U1.AREF
NC_HREF1: U2.AREF
NC_VIN: U1.VIN
NC_VIN1: U2.VIN
NEXT_DEMUX: IC5.9 J5.4
NEXT_DEMUX1: IC11.9 J20.4
OUT_CLOCK_ETHLED: J16.2 U1.D9
OUT_CLOCK_ETHLED1: J32.2 U2.D9
OUT_DATA: J16.4 U1.D7
OUT_DATA1: J32.4 U2.D7
OUT_LATCH: J16.3 U1.D8
OUT_LATCH1: J32.3 U2.D8
RESERVED_1: JP14.1 U1.A4
RESERVED_2: JP14.2 U1.A5
RESERVED_3: JP28.1 U2.A4
RESERVED_4: JP28.2 U2.A5
SECONDARY_1: IC1.13 X3.5
SECONDARY_2: IC1.14 X3.6
SECONDARY_3: IC1.15 X4.5
SECONDARY_4: IC1.12 X4.6
SECONDARY_5: IC1.1 X5.5
SECONDARY_6: IC1.5 X5.6
SECONDARY_7: IC1.2 X6.5
SECONDARY_8: IC1.4 X6.6
SECONDARY_9: IC2.3 J3.5
SECONDARY_10: IC3.3 J3.6
SECONDARY_11: IC7.13 X1.5
SECONDARY_12: IC7.14 X1.6
SECONDARY_13: IC7.15 X7.5
SECONDARY_14: IC7.12 X7.6
SECONDARY_15: IC7.1 X2.5
SECONDARY_16: IC7.5 X2.6
SECONDARY_17: IC7.2 X8.5
SECONDARY_18: IC7.4 X8.6
SECONDARY_19: IC8.3 J18.5
SECONDARY_20: IC9.3 J18.6
SELECT_A: IC1.11 J1.2
SELECT_A1: IC7.11 J17.2
SELECT_B: IC1.10 J1.3
SELECT_B1: IC7.10 J17.3
SELECT_C: IC1.9 J1.4
SELECT_C1: IC7.9 J17.4
SELECT_D: J1.5 X3.2 X4.2 X5.2 X6.2
SELECT_D1: IC2.11 IC3.11 J3.2
SELECT_D2: J17.5 X1.2 X2.2 X7.2 X8.2
SELECT_D3: IC8.11 IC9.11 J18.2
SELECT_E: J1.6 X3.3 X4.3 X5.3 X6.3
SELECT_E1: IC2.10 IC3.10 J3.3
SELECT_E2: J17.6 X1.3 X2.3 X7.3 X8.3
SELECT_E3: IC8.10 IC9.10 J18.3
SELECT_F: J1.7 X3.4 X4.4 X5.4 X6.4
SELECT_F1: IC2.9 IC3.9 J3.4
SELECT_F2: J17.7 X1.4 X2.4 X7.4 X8.4
SELECT_F3: IC8.9 IC9.9 J18.4
USED_ETH_A: U1.D10
USED_ETH_A1: U2.D10
USED_ETH_B: U1.D11
USED_ETH_B1: U2.D11
USED_ETH_C: U1.D12
USED_ETH_C1: U2.D12
USED_ETH_D: U1.D13
USED_ETH_D1: U2.D13
USED_RX: U1.RX
USED_RX1: U2.RX
USED_SD: U1.D4
USED_SD1: U2.D4
USED_TX: U1.TX
USED_TX1: U2.TX